# EAGLE board FF0881SA1_BACK2 (EAGLE 9.6.2)
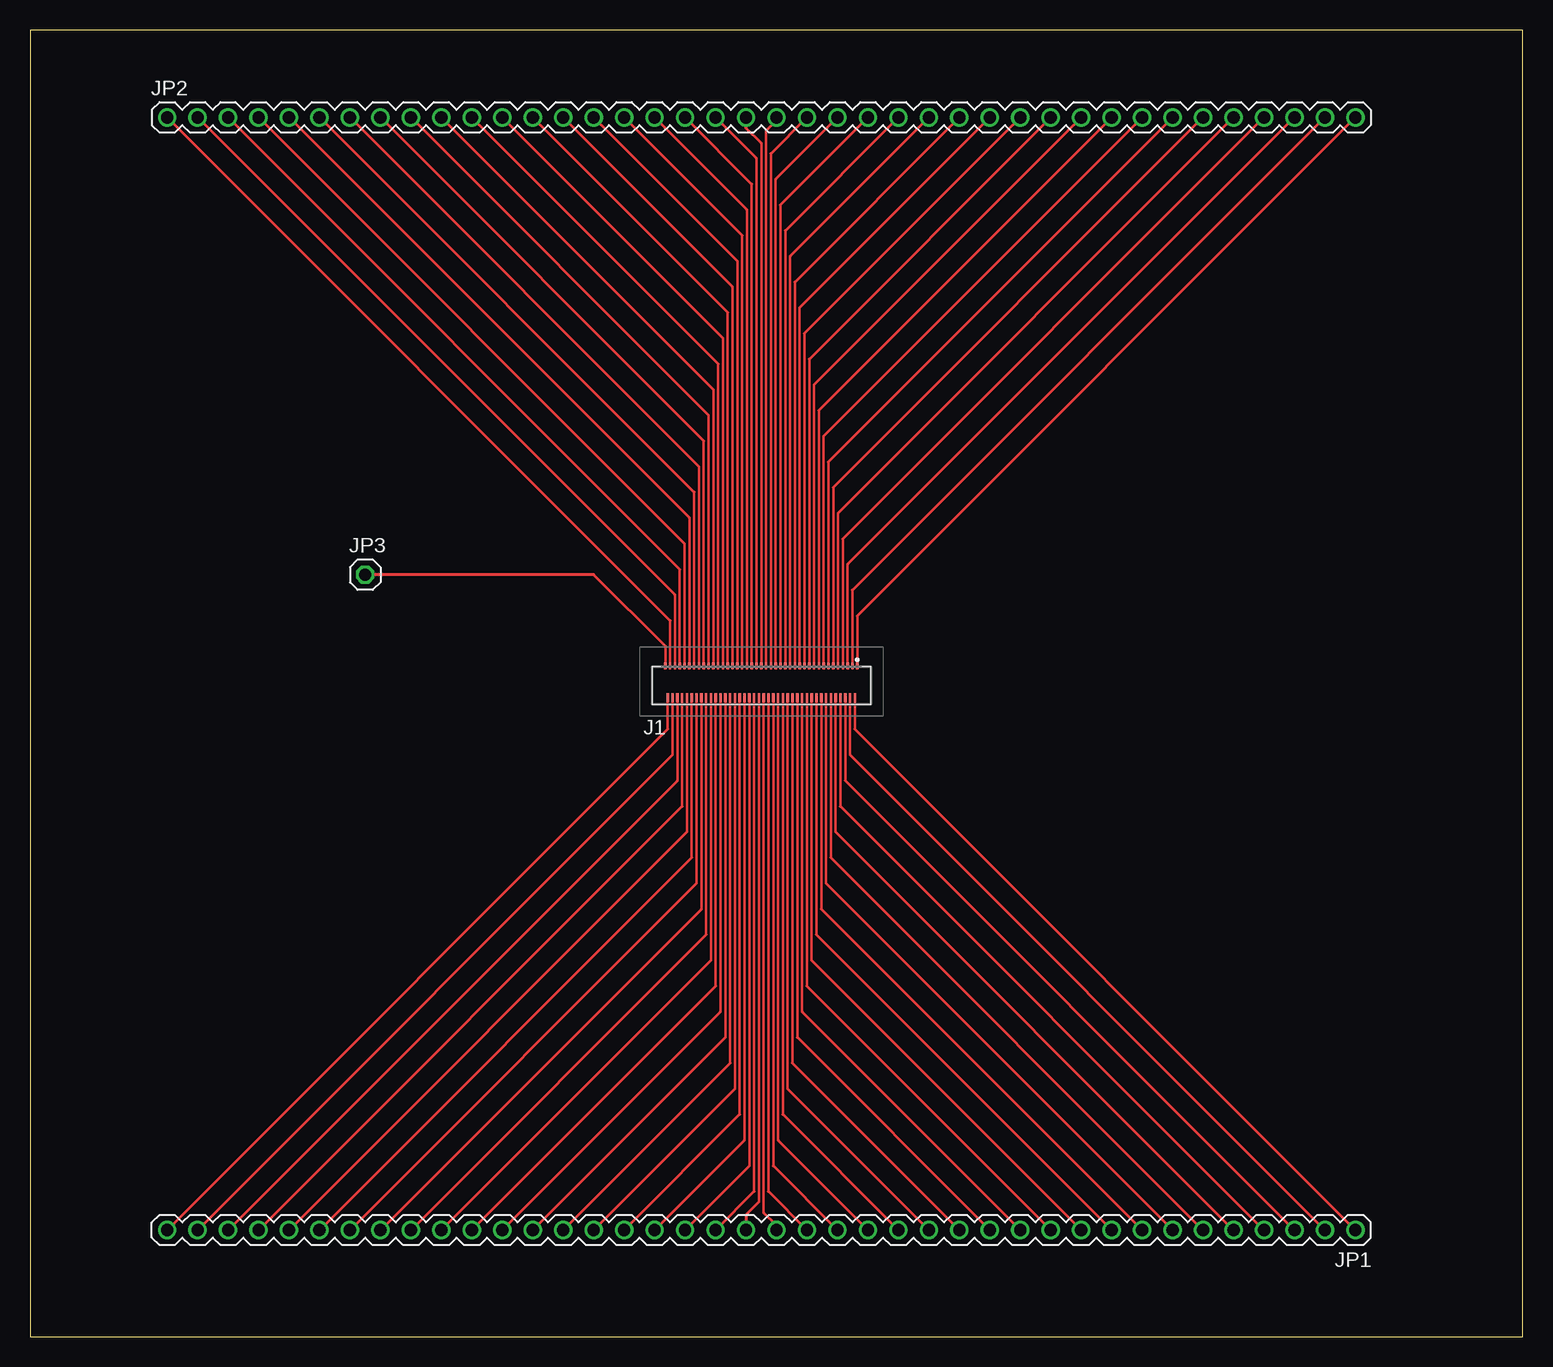
[diagram p0: board, top side]

Size 124.44 x 108.89 mm. Coordinates in mm from the lower left corner, seen from the top.
Outline: 0,0 124.44,0 124.44,108.89 0,108.89 0,0
Copper layers (1*16): Top 0.035mm / dielectric 1.5mm / Bottom 0.035mm
Design rules "default": minimum track width 6mil, minimum drill 0.35mm, track to track 6mil, track to pad 6mil, pad to pad 6mil, via to via 6mil, smd to smd 6mil, copper to edge 40mil, drill to drill 6mil, minimum pad ring 10mil, minimum via ring 8mil, stop-mask expansion 4mil, vias tented up to drill 0mil, thermal gap 10mil

## Footprints (pad centres in the part's own frame; a part is rotated, then mirrored left to right if it is on the bottom)
FF0881SA1R3000 = smd 0.18 x 0.55: 1 8,1.274; 3 7.6,1.274; 5 7.2,1.274; 7 6.8,1.274; 9 6.4,1.274; 11 6,1.274; 13 5.6,1.274; 15 5.2,1.274; 17 4.8,1.274; 19 4.4,1.274; 21 4,1.274; 23 3.6,1.274; 25 3.2,1.274; 27 2.8,1.274; 29 2.4,1.274; 31 2,1.274; 33 1.6,1.274; 35 1.2,1.274; 37 0.8,1.274; 39 0.4,1.274; 41 0,1.274; 43 -0.4,1.274; 45 -0.8,1.274; 47 -1.2,1.274; 49 -1.6,1.274; 51 -2,1.274; 53 -2.4,1.274; 55 -2.8,1.274; 57 -3.2,1.274; 59 -3.6,1.274; 61 -4,1.274; 63 -4.4,1.274; 65 -4.8,1.274; 67 -5.2,1.274; 69 -5.6,1.274; 71 -6,1.274; 73 -6.4,1.274; 75 -6.8,1.274; 77 -7.2,1.274; 79 -7.6,1.274; 81 -8,1.274 | smd 0.18 x 0.7: 2 7.8,-1.351; 4 7.4,-1.351; 6 7,-1.351; 8 6.6,-1.351; 10 6.2,-1.351; 12 5.8,-1.351; 14 5.4,-1.351; 16 5,-1.351; 18 4.6,-1.351; 20 4.2,-1.351; 22 3.8,-1.351; 24 3.4,-1.351; 26 3,-1.351; 28 2.6,-1.351; 30 2.2,-1.351; 32 1.8,-1.351; 34 1.4,-1.351; 36 1,-1.351; 38 0.6,-1.351; 40 0.2,-1.351; 42 -0.2,-1.351; 44 -0.6,-1.351; 46 -1,-1.351; 48 -1.4,-1.351; 50 -1.8,-1.351; 52 -2.2,-1.351; 54 -2.6,-1.351; 56 -3,-1.351; 58 -3.4,-1.351; 60 -3.8,-1.351; 62 -4.2,-1.351; 64 -4.6,-1.351; 66 -5,-1.351; 68 -5.4,-1.351; 70 -5.8,-1.351; 72 -6.2,-1.351; 74 -6.6,-1.351; 76 -7,-1.351; 78 -7.4,-1.351; 80 -7.8,-1.351
1X40 = drill 1.016: 1 -49.53,0; 2 -46.99,0; 3 -44.45,0; 4 -41.91,0; 5 -39.37,0; 6 -36.83,0; 7 -34.29,0; 8 -31.75,0; 9 -29.21,0; 10 -26.67,0; 11 -24.13,0; 12 -21.59,0; 13 -19.05,0; 14 -16.51,0; 15 -13.97,0; 16 -11.43,0; 17 -8.89,0; 18 -6.35,0; 19 -3.81,0; 20 -1.27,0; 21 1.27,0; 22 3.81,0; 23 6.35,0; 24 8.89,0; 25 11.43,0; 26 13.97,0; 27 16.51,0; 28 19.05,0; 29 21.59,0; 30 24.13,0; 31 26.67,0; 32 29.21,0; 33 31.75,0; 34 34.29,0; 35 36.83,0; 36 39.37,0; 37 41.91,0; 38 44.45,0; 39 46.99,0; 40 49.53,0
1X01 = drill 1.016 octagon: 1 0,0

## Placement (x,y rotation side)
J1  FF0881SA1-R3000  [FF0881SA1R3000]  60.96,54.61 0 top
JP1  [1X40]  60.96,8.89 180 top
JP2  [1X40]  60.96,101.6 0 top
JP3  [1X01]  27.94,63.5 0 top

## Library data of the parts
J1 = SamacSys_Parts; DESCRIPTION: FFC & FPC Connectors 81P 0.2MM FPC; HEIGHT: 1mm; MANUFACTURER_NAME: JAE Electronics; MANUFACTURER_PART_NUMBER: FF0881SA1-R3000; MOUSER_PART_NUMBER: 656-FF0881SA1-R3000; MOUSER_PRICE-STOCK: https://www.mouser.co.uk/ProductDetail/JAE-Electronics/FF0881SA1-R3000?qs=e3doH35UsB4mcpzu8vQ7Tw%3D%3D
JP1-JP3 = pinhead

## Nets
N$1: J1.1 JP2.40
N$2: J1.3 JP2.39
N$3: J1.5 JP2.38
N$4: J1.7 JP2.37
N$5: J1.9 JP2.36
N$6: J1.11 JP2.35
N$7: J1.13 JP2.34
N$8: J1.15 JP2.33
N$9: J1.17 JP2.32
N$10: J1.19 JP2.31
N$11: J1.21 JP2.30
N$12: J1.23 JP2.29
N$13: J1.2 JP1.1
N$14: J1.4 JP1.2
N$15: J1.6 JP1.3
N$16: J1.8 JP1.4
N$17: J1.10 JP1.5
N$18: J1.12 JP1.6
N$19: J1.14 JP1.7
N$20: J1.16 JP1.8
N$21: J1.18 JP1.9
N$22: J1.20 JP1.10
N$23: J1.22 JP1.11
N$24: J1.24 JP1.12
N$25: J1.26 JP1.13
N$26: J1.28 JP1.14
N$27: J1.30 JP1.15
N$28: J1.32 JP1.16
N$29: J1.34 JP1.17
N$30: J1.36 JP1.18
N$31: J1.38 JP1.19
N$32: J1.40 JP1.20
N$33: J1.42 JP1.21
N$34: J1.44 JP1.22
N$35: J1.25 JP2.28
N$36: J1.27 JP2.27
N$37: J1.29 JP2.26
N$38: J1.31 JP2.25
N$39: J1.33 JP2.24
N$40: J1.35 JP2.23
N$41: J1.37 JP2.22
N$42: J1.39 JP2.21
N$43: J1.41 JP2.20
N$44: J1.43 JP2.19
N$45: J1.46 JP1.23
N$46: J1.48 JP1.24
N$47: J1.50 JP1.25
N$48: J1.52 JP1.26
N$49: J1.54 JP1.27
N$50: J1.56 JP1.28
N$51: J1.58 JP1.29
N$52: J1.60 JP1.30
N$53: J1.62 JP1.31
N$54: J1.64 JP1.32
N$55: J1.66 JP1.33
N$56: J1.68 JP1.34
N$57: J1.70 JP1.35
N$58: J1.72 JP1.36
N$59: J1.74 JP1.37
N$60: J1.76 JP1.38
N$61: J1.78 JP1.39
N$62: J1.80 JP1.40
N$63: J1.45 JP2.18
N$64: J1.47 JP2.17
N$65: J1.49 JP2.16
N$66: J1.51 JP2.15
N$67: J1.53 JP2.14
N$68: J1.55 JP2.13
N$69: J1.57 JP2.12
N$70: J1.59 JP2.11
N$71: J1.61 JP2.10
N$72: J1.63 JP2.9
N$73: J1.65 JP2.8
N$74: J1.67 JP2.7
N$75: J1.69 JP2.6
N$76: J1.71 JP2.5
N$77: J1.73 JP2.4
N$78: J1.75 JP2.3
N$79: J1.77 JP2.2
N$80: J1.79 JP2.1
N$81: J1.81 JP3.1

## Tracks (layer width: path | path; a pad name or v marks a point on that pad's centre or on a via)
N$1
  Top 0.203: J1.1 68.96,60.07
  Top 0.254: 68.96,60.07 JP2.40
N$2
  Top 0.203: J1.3 68.56,62.21
  Top 0.254: 68.56,62.21 JP2.39
N$3
  Top 0.203: J1.5 68.16,64.35
  Top 0.254: 68.16,64.35 JP2.38
N$4
  Top 0.203: J1.7 67.76,66.49
  Top 0.254: 67.76,66.49 JP2.37
N$5
  Top 0.203: J1.9 67.36,68.63
  Top 0.254: 67.36,68.63 JP2.36
N$6
  Top 0.203: J1.11 66.96,70.77
  Top 0.254: 66.96,70.77 JP2.35
N$7
  Top 0.203: J1.13 66.56,72.91
  Top 0.254: 66.56,72.91 JP2.34
N$8
  Top 0.203: J1.15 66.16,75.05
  Top 0.254: 66.16,75.05 JP2.33
N$9
  Top 0.203: J1.17 65.76,77.19
  Top 0.254: 65.76,77.19 JP2.32
N$10
  Top 0.203: J1.19 65.36,79.33
  Top 0.254: 65.36,79.33 JP2.31
N$11
  Top 0.203: J1.21 64.96,81.47
  Top 0.254: 64.96,81.47 JP2.30
N$12
  Top 0.203: J1.23 64.56,83.61
  Top 0.254: 64.56,83.61 JP2.29
N$13
  Top 0.203: J1.2 68.76,50.62
  Top 0.254: 68.76,50.62 JP1.1
N$14
  Top 0.203: J1.4 68.36,48.48
  Top 0.254: 68.36,48.48 JP1.2
N$15
  Top 0.203: J1.6 67.96,46.34
  Top 0.254: 67.96,46.34 JP1.3
N$16
  Top 0.203: J1.8 67.56,44.2
  Top 0.254: 67.56,44.2 JP1.4
N$17
  Top 0.203: J1.10 67.16,42.06
  Top 0.254: 67.16,42.06 JP1.5
N$18
  Top 0.203: J1.12 66.76,39.92
  Top 0.254: 66.76,39.92 JP1.6
N$19
  Top 0.203: J1.14 66.36,37.78
  Top 0.254: 66.36,37.78 JP1.7
N$20
  Top 0.203: J1.16 65.96,35.64
  Top 0.254: 65.96,35.64 JP1.8
N$21
  Top 0.203: J1.18 65.56,33.5
  Top 0.254: 65.56,33.5 JP1.9
N$22
  Top 0.203: J1.20 65.16,31.36
  Top 0.254: 65.16,31.36 JP1.10
N$23
  Top 0.203: J1.22 64.76,29.22
  Top 0.254: 64.76,29.22 JP1.11
N$24
  Top 0.203: J1.24 64.36,27.08
  Top 0.254: 64.36,27.08 JP1.12
N$25
  Top 0.203: J1.26 63.96,24.94
  Top 0.254: 63.96,24.94 JP1.13
N$26
  Top 0.203: J1.28 63.56,22.8
  Top 0.254: 63.56,22.8 JP1.14
N$27
  Top 0.203: J1.30 63.16,20.66
  Top 0.254: 63.16,20.66 JP1.15
N$28
  Top 0.203: J1.32 62.76,18.52
  Top 0.254: 62.76,18.52 JP1.16
N$29
  Top 0.203: J1.34 62.36,16.38
  Top 0.254: 62.36,16.38 JP1.17
N$30
  Top 0.203: J1.36 61.96,14.24
  Top 0.254: 61.96,14.24 JP1.18
N$31
  Top 0.203: J1.38 61.56,12.1
  Top 0.254: 61.56,12.1 JP1.19
N$32
  Top 0.203: J1.40 61.16,10.34
  Top 0.254: 61.16,10.34 62.23,9.27 JP1.20
N$33
  Top 0.203: J1.42 60.76,11.23
  Top 0.254: 60.76,11.23 59.69,10.16 JP1.21
N$34
  Top 0.203: J1.44 60.36,12.1
  Top 0.254: 60.36,12.1 JP1.22
N$35
  Top 0.203: J1.25 64.16,85.75
  Top 0.254: 64.16,85.75 JP2.28
N$36
  Top 0.203: J1.27 63.76,87.89
  Top 0.254: 63.76,87.89 JP2.27
N$37
  Top 0.203: J1.29 63.36,90.03
  Top 0.254: 63.36,90.03 JP2.26
N$38
  Top 0.203: J1.31 62.96,92.17
  Top 0.254: 62.96,92.17 JP2.25
N$39
  Top 0.203: J1.33 62.56,94.31
  Top 0.254: 62.56,94.31 JP2.24
N$40
  Top 0.203: J1.35 62.16,96.45
  Top 0.254: 62.16,96.45 JP2.23
N$41
  Top 0.203: J1.37 61.76,98.59
  Top 0.254: 61.76,98.59 JP2.22
N$42
  Top 0.203: J1.39 61.36,100.48
  Top 0.254: JP2.21 62.23,101.35 61.36,100.48
N$43
  Top 0.203: J1.41 60.96,99.44
  Top 0.254: 60.96,99.44 59.69,100.71 JP2.20
N$44
  Top 0.203: J1.43 60.56,98.19
  Top 0.254: 60.56,98.19 JP2.19
N$45
  Top 0.203: J1.46 59.96,14.24
  Top 0.254: 59.96,14.24 JP1.23
N$46
  Top 0.203: J1.48 59.56,16.38
  Top 0.254: 59.56,16.38 JP1.24
N$47
  Top 0.203: J1.50 59.16,18.52
  Top 0.254: 59.16,18.52 JP1.25
N$48
  Top 0.203: J1.52 58.76,20.66
  Top 0.254: 58.76,20.66 JP1.26
N$49
  Top 0.203: J1.54 58.36,22.8
  Top 0.254: 58.36,22.8 JP1.27
N$50
  Top 0.203: J1.56 57.96,24.94
  Top 0.254: 57.96,24.94 JP1.28
N$51
  Top 0.203: J1.58 57.56,27.08
  Top 0.254: 57.56,27.08 JP1.29
N$52
  Top 0.203: J1.60 57.16,29.22
  Top 0.254: 57.16,29.22 JP1.30
N$53
  Top 0.203: J1.62 56.76,31.36
  Top 0.254: 56.76,31.36 JP1.31
N$54
  Top 0.203: J1.64 56.36,33.5
  Top 0.254: 56.36,33.5 JP1.32
N$55
  Top 0.203: J1.66 55.96,35.64
  Top 0.254: 55.96,35.64 JP1.33
N$56
  Top 0.203: J1.68 55.56,37.78
  Top 0.254: 55.56,37.78 JP1.34
N$57
  Top 0.203: J1.70 55.16,39.92
  Top 0.254: 55.16,39.92 JP1.35
N$58
  Top 0.203: J1.72 54.76,42.06
  Top 0.254: 54.76,42.06 JP1.36
N$59
  Top 0.203: J1.74 54.36,44.2
  Top 0.254: 54.36,44.2 JP1.37
N$60
  Top 0.203: J1.76 53.96,46.34
  Top 0.254: 53.96,46.34 JP1.38
N$61
  Top 0.203: J1.78 53.56,48.48
  Top 0.254: 53.56,48.48 JP1.39
N$62
  Top 0.203: J1.80 53.16,50.62
  Top 0.254: 53.16,50.62 JP1.40
N$63
  Top 0.203: J1.45 60.16,96.05
  Top 0.254: 60.16,96.05 JP2.18
N$64
  Top 0.203: J1.47 59.76,93.91
  Top 0.254: 59.76,93.91 JP2.17
N$65
  Top 0.203: J1.49 59.36,91.77
  Top 0.254: 59.36,91.77 JP2.16
N$66
  Top 0.203: J1.51 58.96,89.63
  Top 0.254: 58.96,89.63 JP2.15
N$67
  Top 0.203: J1.53 58.56,87.49
  Top 0.254: 58.56,87.49 JP2.14
N$68
  Top 0.203: J1.55 58.16,85.35
  Top 0.254: 58.16,85.35 JP2.13
N$69
  Top 0.203: J1.57 57.76,83.21
  Top 0.254: 57.76,83.21 JP2.12
N$70
  Top 0.203: J1.59 57.36,81.07
  Top 0.254: 57.36,81.07 JP2.11
N$71
  Top 0.203: J1.61 56.96,78.93
  Top 0.254: 56.96,78.93 JP2.10
N$72
  Top 0.203: J1.63 56.56,76.79
  Top 0.254: 56.56,76.79 JP2.9
N$73
  Top 0.203: J1.65 56.16,74.65
  Top 0.254: 56.16,74.65 JP2.8
N$74
  Top 0.203: J1.67 55.76,72.51
  Top 0.254: 55.76,72.51 JP2.7
N$75
  Top 0.203: J1.69 55.36,70.37
  Top 0.254: 55.36,70.37 JP2.6
N$76
  Top 0.203: J1.71 54.96,68.23
  Top 0.254: 54.96,68.23 JP2.5
N$77
  Top 0.203: J1.73 54.56,66.09
  Top 0.254: 54.56,66.09 JP2.4
N$78
  Top 0.203: J1.75 54.16,63.95
  Top 0.254: 54.16,63.95 JP2.3
N$79
  Top 0.203: J1.77 53.76,61.81
  Top 0.254: 53.76,61.81 JP2.2
N$80
  Top 0.203: J1.79 53.36,59.67
  Top 0.254: 53.36,59.67 JP2.1
N$81
  Top 0.203: J1.81 52.96,57.53
  Top 0.254: JP3.1 46.99,63.5 52.96,57.53